# Altium PCB Final Project.PcbDoc
Units mm, origin at the board's own origin, x right, y up, seen from the top; angles counter-clockwise.
Board outline 152.4 x 101.6 mm, 2 copper layers (Top Layer, Bottom Layer); 34 components, 32 nets, 114 pads, 0 vias.
Unrouted connection lines stored in the file: 63.
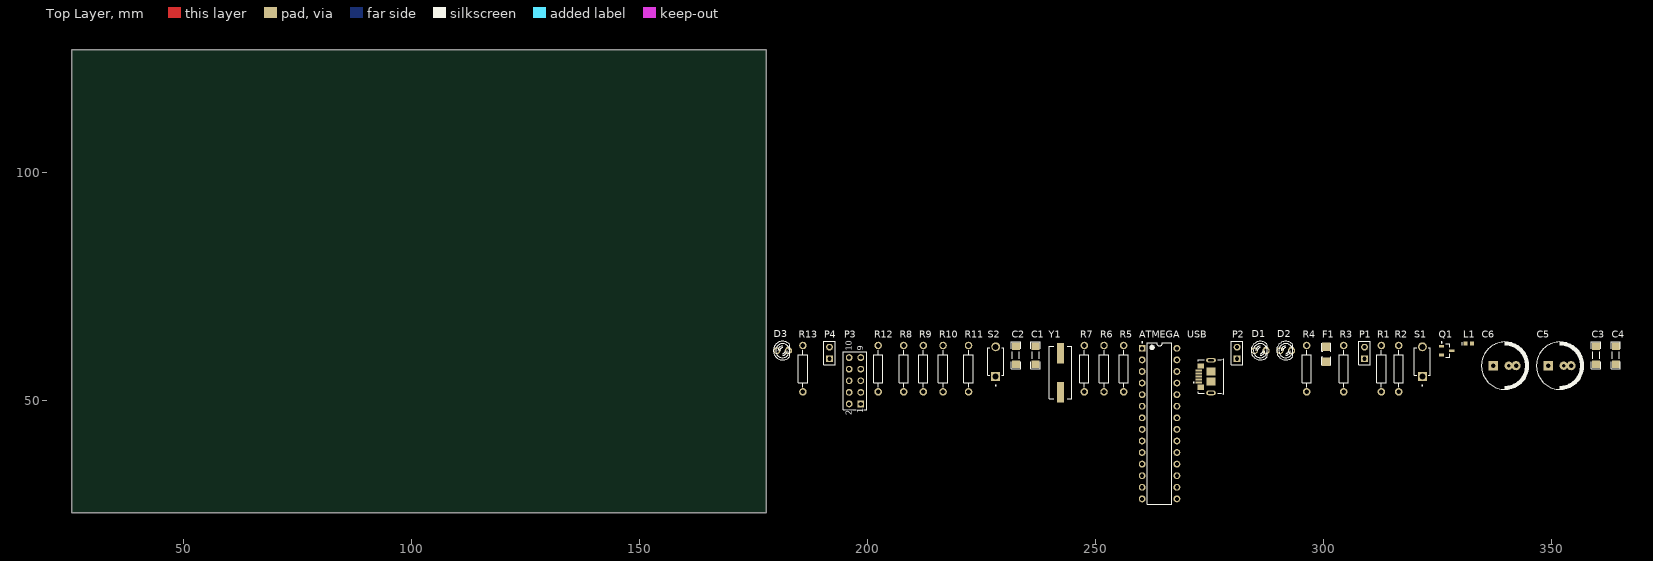
[diagram p0: Top Layer view]
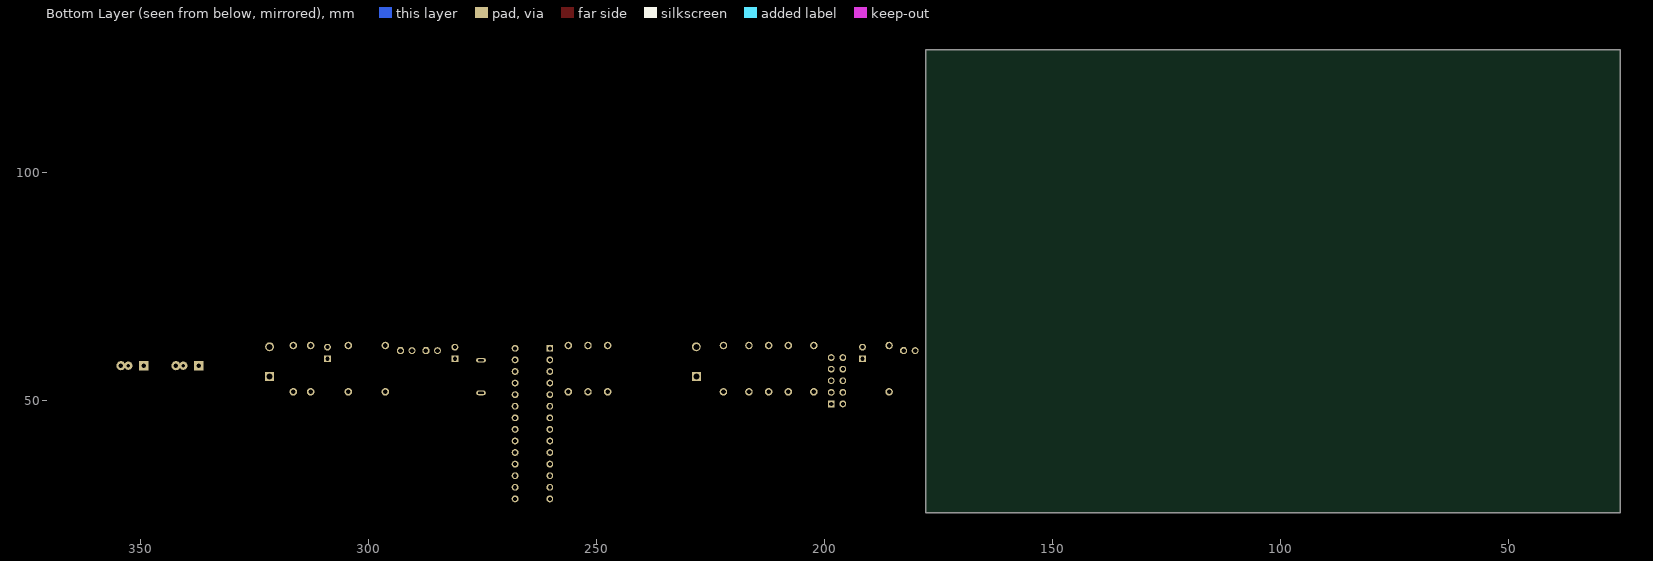
[diagram p1: Bottom Layer view, seen from below]

## Layer stack, top to bottom
Top Solder: solder mask 0.0102, Solder Resist, Dk 3.5
Top Layer: signal copper 0.0356
Dielectric 1: dielectric 0.32, FR-4, Dk 4.8
Bottom Layer: signal copper 0.0356
Bottom Solder: solder mask 0.0102, Solder Resist, Dk 3.5

## Board outline
25.4,25.4 177.8,25.4 177.8,127 25.4,127

## Design rules (kind name [scope] priority, off if disabled: settings)
Clearance [All] p1: gap=0.254 ignorepadtopadclearanceinfootprint=FALSE except(0: Arc-Hole Track-Hole SMDPad-Hole THPad-Hole Via-Hole Fill-Hole Poly-Hole Region-Hole Text-Hole)
PolygonConnect [All] p1: connectstyle=Relief reliefconductorwidth=0.254 reliefentries=4 polygonreliefangle="90 Angle" airgapwidth=0.254
RoutingVias [All] p1: holewidth=0.711 width=1.27 viastyle="Through Hole" minholewidth=0.711 minwidth=1.27 maxholewidth=0.711 maxwidth=1.27
SolderMaskExpansion [All] p1: expansion=0.102 istentingtop=FALSE
Width [All] p1: maxlimit=0.254 minlimit=0.254 preferedwidth=0.254
30 further rules are at their usual default settings.

## Components (designator, comment, footprint, x,y, rotation, side; value= is the part's Value field where it differs from the comment)
ATMEGA "ATmega8A-PU" 28P3 264.033,44.958 r0 top
C1 "22pF" CAPC4817X12N 236.855,59.944 r90 top
C2 "22pF" CAPC4817X12N 232.537,59.944 r90 top
C3 "100nF" CAPC4817X12N 359.791,59.944 r90 top
C4 "100nF" CAPC4817X12N 364.109,59.944 r90 top
C5 "10uF" "Cap electrolitic radial 10x20-5" 351.79,57.658 r0 top
C6 "10uF" "Cap electrolitic radial 10x20-5" 339.725,57.658 r0 top
D1 "LED" My_LED3MM 286.131,60.96 r0 top
D2 "LED" My_LED3MM 291.719,60.96 r0 top
D3 "LED" My_LED3MM 181.356,60.96 r0 top
F1 "F=1.0 A" "1206 FUSE" 300.609,60.198 r90 top
L1 "Inductor" INDC1608L 331.851,62.484 r0 top value=10uH
P1 "UPDATE" HDR1X2 308.991,59.182 r90 top
P2 "CLK" HDR1X2 281.051,59.182 r90 top
P3 "SW 1" HDR2X5 198.501,49.276 r90 top
P4 "VCC" HDR1X2 191.643,59.182 r90 top
Q1 "BC807" SOT23_BEC_N 327.025,60.96 r0 top
R1 "1k" My_axial-0.4 312.674,57.023 r90 top value=270
R2 "1k" My_axial-0.4 316.484,57.023 r90 top value=270
R3 "1k" My_axial-0.4 304.419,57.023 r90 top value=4k
R4 "1k" My_axial-0.4 296.291,57.023 r90 top value=2k
R5 "1k" My_axial-0.4 256.159,57.023 r90 top value=100
R6 "1k" My_axial-0.4 251.841,57.023 r90 top value=100
R7 "10k" My_axial-0.4 247.523,57.023 r90 top
R8 "1k" My_axial-0.4 207.899,57.023 r90 top value=270
R9 "1k" My_axial-0.4 212.217,57.023 r90 top value=270
R10 "1k" My_axial-0.4 216.535,57.023 r90 top value=270
R11 "1k" My_axial-0.4 222.123,57.023 r90 top value=270
R12 "1k" My_axial-0.4 202.311,57.023 r90 top value=270
R13 "1k" My_axial-0.4 185.801,57.023 r90 top value=270
S1 "Disconnect" SW_TL1107BF130WQ 321.691,58.547 r90 top
S2 "Reset Taget" SW_TL1107BF130WQ 228.092,58.547 r90 top
USB "USB3075-30-A" GCT_USB3075-30-A 272.669,53.975 r90 top
Y1 "12 MHz" "Crystal SMD" 242.316,56.134 r90 top

## Footprints (in the part's own frame and the unit in brackets; to place one, negate y for a bottom-side part, rotate by r counter-clockwise, add the part's x,y. Pads: shape width x height; smd on the part's side, far side on the other; paste and mask are expansions set on the pad)
28P3 [mm] "DIP, 28-Leads, Row Spacing 7.62mm, Pitch 2.54mm, Body 34.67x7.3mm"
  rect 1.5x1.5 hole 0.9: 1(-3.81,16.51)
  round 1.5 hole 0.9: 2(-3.81,13.97) 3(-3.81,11.43) 4(-3.81,8.89) 5(-3.81,6.35) 6(-3.81,3.81) 7(-3.81,1.27) 8(-3.81,-1.27) 9(-3.81,-3.81) 10(-3.81,-6.35) 11(-3.81,-8.89) 12(-3.81,-11.43) 13(-3.81,-13.97) 14(-3.81,-16.51) 15(3.81,-16.51) 16(3.81,-13.97) 17(3.81,-11.43) 18(3.81,-8.89) 19(3.81,-6.35) 20(3.81,-3.81) 21(3.81,-1.27) 22(3.81,1.27) 23(3.81,3.81) 24(3.81,6.35) 25(3.81,8.89) 26(3.81,11.43) 27(3.81,13.97) 28(3.81,16.51)
  silkscreen extent -3.93,-17.7 2.65,17.93, body extent -3.6,-17.65 3.6,17.65, height 4.58
"1206 FUSE" [mm] "Fast Acting Smd 1206 non-Resettable Fuse Chip For Pcb Board-Design:Abbas Basereh"
  rect 1.85x1.85 smd: 1(-1.65,0) 2(1.65,0)
  silkscreen extent -2.41,-1.02 2.41,1.02, body extent -1.6,-0.8 1.6,0.8, height 1
"Cap electrolitic radial 10x20-5" [mm] "Cap electrolitic radial 10x20-5-Design:Abbas Basereh"
  rect 2x2 hole 1: 1(-2.5,0)
  round 1.8 hole 0.8: 2(0.875,0)
  round 2 hole 1: 2(2.5,0)
  silkscreen extent -5.1,-5.2 5.3,5.2, body extent -5,-5 5,5, height 20
CAPC4817X12N [mm] "Chip Capacitor, 2-Leads, Body 4/80x1/70mm, IPC Medium Density-Design:Abbas Basereh"
  rect 1.65x1.75 smd: 1(-1.95,0) 2(1.95,0)
  silkscreen extent -2.92,-1.02 2.92,1.02, body extent -1.6,-0.8 1.6,0.8, height 1
"Crystal SMD" [mm] "DESIGNER ABBAS BASEREH"
  rect 4.5x1.5 smd: 1(-4.25,0) 2(4.25,0)
  silkscreen extent -5.75,-2.5 5.75,2.5, body extent -6.21,-2.25 6.09,2.25, height 5.18
GCT_USB3075-30-A [mm]
  rect 0.4x1.4 smd: 1(0,0) 2(0.65,0) 3(1.3,0) 4(1.95,0) 5(2.6,0)
  rect 1.15x1.45 smd: S1(-1.02,-0.42) S2(3.62,-0.42)
  rect 1.75x1.9 smd: S3(0.175,-2.65) S4(2.425,-2.65)
  oval 1.05x2.1 hole 0.45 slot 1.25 at 90 deg: S5(-2.275,-2.65) S6(4.875,-2.65)
  silkscreen extent -2.6,-5.4 5.2,1.25, body extent -3.9,-2.78 3.9,2.78, height 2.7
HDR1X2 [mm] "Connector; Header; 2 Position"
  rect 1.5x1.5 hole 0.9: 1(0,0)
  round 1.5 hole 0.9: 2(2.54,0)
  silkscreen extent -1.27,-1.27 3.81,1.27, body extent -1.27,-1.28 3.81,1.26, height 8.79
HDR2X5 [mm] "Connector; Header; 5x2 Position"
  rect 1.5x1.5 hole 0.9: 1(0,0)
  round 1.5 hole 0.9: 2(0,2.54) 3(2.54,0) 4(2.54,2.54) 5(5.08,0) 6(5.08,2.54) 7(7.62,0) 8(7.62,2.54) 9(10.16,0) 10(10.16,2.54)
  silkscreen extent -1.27,-1.27 11.43,3.81
INDC1608L [mm] "Chip Inductor, Body 1.6x0.8mm, IPC High Density"
  rect 0.8x0.9 smd: 1(-0.7,0) 2(0.7,0)
  silkscreen extent -1.4,-0.35 -1.4,0.35, body extent -0.8,-0.4 0.8,0.4, height 0.95
My_axial-0.4 [mil]
  round 65 hole 40: 1(-200.5,-0.5) 2(199.5,-0.5)
  silkscreen extent -160,-41 160,40
My_LED3MM [mil]
  round 60 hole 40: A(-50,0)
  oct 60x60 hole 40: K(50,0)
  silkscreen extent -80,-80 62,80
SOT23_BEC_N [mm] "SOT23, 3-Leads, Body 2.9x1.3mm, Pitch 0.95mm, Lead Span 2.4mm, IPC Medium Density"
  rect 1.15x0.6 smd: 1(-1.125,0.95) 2(-1.125,-0.95) 3(1.125,0)
  silkscreen extent -1.25,-1.5 0.7,1.92, body extent -1.23,-1.45 1.07,1.45, height 1
SW_TL1107BF130WQ [mm]
  rect 1.95x1.95 / inner round 1.95 / far side rect 1.95x1.95 hole 1.3: 1(-3.25,0)
  round 1.95 hole 1.3: 2(3.25,0)
  silkscreen extent -5.32,-1.75 3,1.75, body extent -3.95,-1.75 3.95,1.75, height 5

## Part data
ATMEGA: "8-bit AVR Microcontroller, 8KB Flash, 512 Bytes EEPROM, 1KB SRAM, 28-pin PDIP, Industrial Grade (-40°C to 85°C)", Supplier Part Number 1=ATMEGA8A-PU-ND, ComponentLink1Description="Manufacturer Link", ComponentLink1URL=http://www.atmel.com/products/avr/default.asp?, ComponentLink2Description="ATmega8A Datasheet", ComponentLink2URL=http://www.atmel.com/dyn/resources/prod_documents/doc8159.pdf, ComponentLink3Description="ATmega8A Summary", ComponentLink3URL=http://www.atmel.com/dyn/resources/prod_documents/8159S.pdf, ComponentLink4Description="Atmel.com Home", ComponentLink4URL=http://www.atmel.com, DatasheetVersion="revC, Jul-2009", PackageDescription="28-lead (0.300\"/7.62mm Wide) Plastic Dual Inline Package (PDIP)", PackageReference=28P3, PackageVersion="revB, Sep-2001", Published=1-Apr-2010, Publisher="Altium Limited", Supplier 1=Digi-Key, Supplier 2=Farnell, Supplier 3=Mouser, Supplier Part Number 2=1748534, Supplier Part Number 3=556-ATMEGA8A-PU
C1 C2 C3 C4: library part "CAP SMD 1206", "CAP 1206", Data=16-12-2016, Desc.="CAP SMD 1206", Designer="Abbas Basereh"
C5 C6: library part "Cap ELECTROLITIC TOTAL SIZE", "Cap electrolitic radial", Data=16-12-2016, Designer="Abbas Basereh"
D1 D2 D3: "Typical INFRARED GaAs LED", LatestRevisionDate=08-Jul-2005, LatestRevisionNote="Mech Layer 1 removed.", Published=8-Jun-2000, Publisher="Altium Limited"
F1: library part "Fuse SMD1206", "SMD Fuses 1206", Data=16-12-2016, Desc.="SMD Fuses 1206", Designer="Abbas Basereh"
P1 P2 P4: library part "Header 2", "Header, 2-Pin", LatestRevisionDate=17-Jul-2002, LatestRevisionNote="Re-released for DXP Platform.", Publisher="Altium Limited"
P3: library part "Header 5X2", "Header, 5-Pin, Dual row", LatestRevisionDate=17-Jul-2002, LatestRevisionNote="Re-released for DXP Platform.", Publisher="Altium Limited"
Q1: "PNP General-purpose Transistor", LatestRevisionDate=29-May-2009, LatestRevisionNote="IPC-7351 Footprint Added.", PackageDescription="3-Pin SOT-23 Package 0.95 mm Pitch, 2.4 mm Lead Span", PackageReference=SOT-23B, PackageVersion=Aug-1999, Published=8-Jun-2000, Publisher="Altium Limited"
R1 R2 R3 R4 R5 R6 R7 R8 R9 R10 R11 R12 R13: library part Res, "resistor 1/4 wat"
S1 S2: library part TL1107BF130WQ, "SWITCH TACTILE SPST-NO 0.05A 12V", Package=None, Availability="In Stock", Check_prices=https://www.snapeda.com/parts/TL1107BF130WQ/E-Switch/view-part/?ref=eda, MF=E-Switch, MP=TL1107BF130WQ, Price=None, Purchase-URL=https://pricing.snapeda.com/search/part/TL1107BF130WQ/?ref=eda, SnapEDA_Link=https://www.snapeda.com/parts/TL1107BF130WQ/E-Switch/view-part/?ref=snap
USB: "USB - micro B USB 2.0 Receptacle Connector 5 Position Surface Mount, Right Angle; Through Hole, 2.35mm profile, 5 Pins, Horizontal, Bottom mount", Package=None, Availability="In Stock", Check_prices=https://www.snapeda.com/parts/USB3075-30-A/Global+Connector+Technology/view-part/?ref=eda, MF="Global Connector Technology", MP=USB3075-30-A, Price=None, SnapEDA_Link=https://www.snapeda.com/parts/USB3075-30-A/Global+Connector+Technology/view-part/?ref=snap
Y1: library part XTAL, "XTAL Crystal", ComponentLink1Description=Datasheet, ComponentLink2Description=Reference, Design Date=2017-1-3, Designer="ABBAS BASEREH", Mounting Technology="Surface Mount\Through-Hole", Status=Unreleased
L1: Code_IEC=1005, Code_JEITA=0402, LatestRevisionDate=29-May-2009, LatestRevisionNote="IPC-7351 Footprint Added.", PackageDescription="Chip Inductor", PackageReference=0402-A, Published=8-Jun-2000, Publisher="Altium Limited"

## Nets (pads, with @x,y where several pads share a name; then routed paths per layer and width w, separated by ;. In a path a pad name is that pad's centre, name@x,y a point inside that pad or via, vN(x,y) a via of type N, cw(c..) or ccw(c..) an arc to the next point about the centre after c; other vN are vias at no path point)
+5: ATMEGA.7 ATMEGA.20 ATMEGA.21 C3.2 C4.2 C5.1 C6.1 L1.1 P4.2 R1.2 R2.2 R4.2 R7.1
GND: ATMEGA.22 C3.1 C4.1 C5.2 C6.2 D3.K P2.2 P3.8 P3.10 R3.1 S2.2 USB.5
NetATMEGA_2: ATMEGA.2 P3.6
NetATMEGA_3: ATMEGA.3 R12.2
NetATMEGA_4: ATMEGA.4 ATMEGA.15 R6.1
NetATMEGA_8: ATMEGA.8 C1.2 C2.2
NetATMEGA_9: ATMEGA.9 C1.1 Y1.2
NetATMEGA_10: ATMEGA.10 C2.1 Y1.1
NetATMEGA_14: ATMEGA.14 R4.1 R5.1
NetATMEGA_16: ATMEGA.16 P1.2 R10.2 S2.1
NetATMEGA_17: ATMEGA.17 R11.2
NetATMEGA_18: ATMEGA.18 R8.2
NetATMEGA_19: ATMEGA.19 R9.2
NetATMEGA_23: ATMEGA.23 D2.K
NetATMEGA_24: ATMEGA.24 D1.K
NetATMEGA_25: ATMEGA.25 P2.1
NetD1_A: D1.A R1.1
NetD2_A: D2.A R2.1
NetD3_A: D3.A R13.1
NetF1_1: F1.1 USB.1
NetF1_2: F1.2 Q1.2 S1.1
NetL1_2: L1.2 Q1.3
NetP1_1: P1.1 R7.2
NetP3_1: P3.1 R11.1
NetP3_2: P3.2 P4.1 R13.2
NetP3_4: P3.4 R12.1
NetP3_5: P3.5 R10.1
NetP3_7: P3.7 R9.1
NetP3_9: P3.9 R8.1
NetQ1_1: Q1.1 R3.2 S1.2
NetR5_2: R5.2 USB.2
NetR6_2: R6.2 USB.3
pads on no net: ATMEGA.1 ATMEGA.5 ATMEGA.6 ATMEGA.11 ATMEGA.12 ATMEGA.13 ATMEGA.26 ATMEGA.27 ATMEGA.28 P3.3 USB.4 USB.S1 USB.S2 USB.S3 USB.S4 USB.S5 USB.S6

## Text inside footprints (layer, text, board x,y; h text height)
P3: Top Overlay "10" at 196.469,60.96 h1.27 r90; Top Overlay "9" at 199.009,60.96 h1.27 r90; Top Overlay "1" at 199.009,47.244 h1.27 r90; Top Overlay "2" at 196.469,46.736 h1.27 r90
USB: Mechanical 13 "PCB EDGE" at 276.724,59.691 h0.41 r90